# Altium PCB FPGA_DB.PcbDoc (part 2 of 5)
Units mil, origin at the board's own origin, x right, y up, seen from the top; angles counter-clockwise.
Board outline 5980 x 6510 mil, 4 copper layers (Top, Ground Plane, Power Plane, Bottom), stack 61.497 mil thick; 140 components, 246 nets, 1021 pads, 2685 vias.
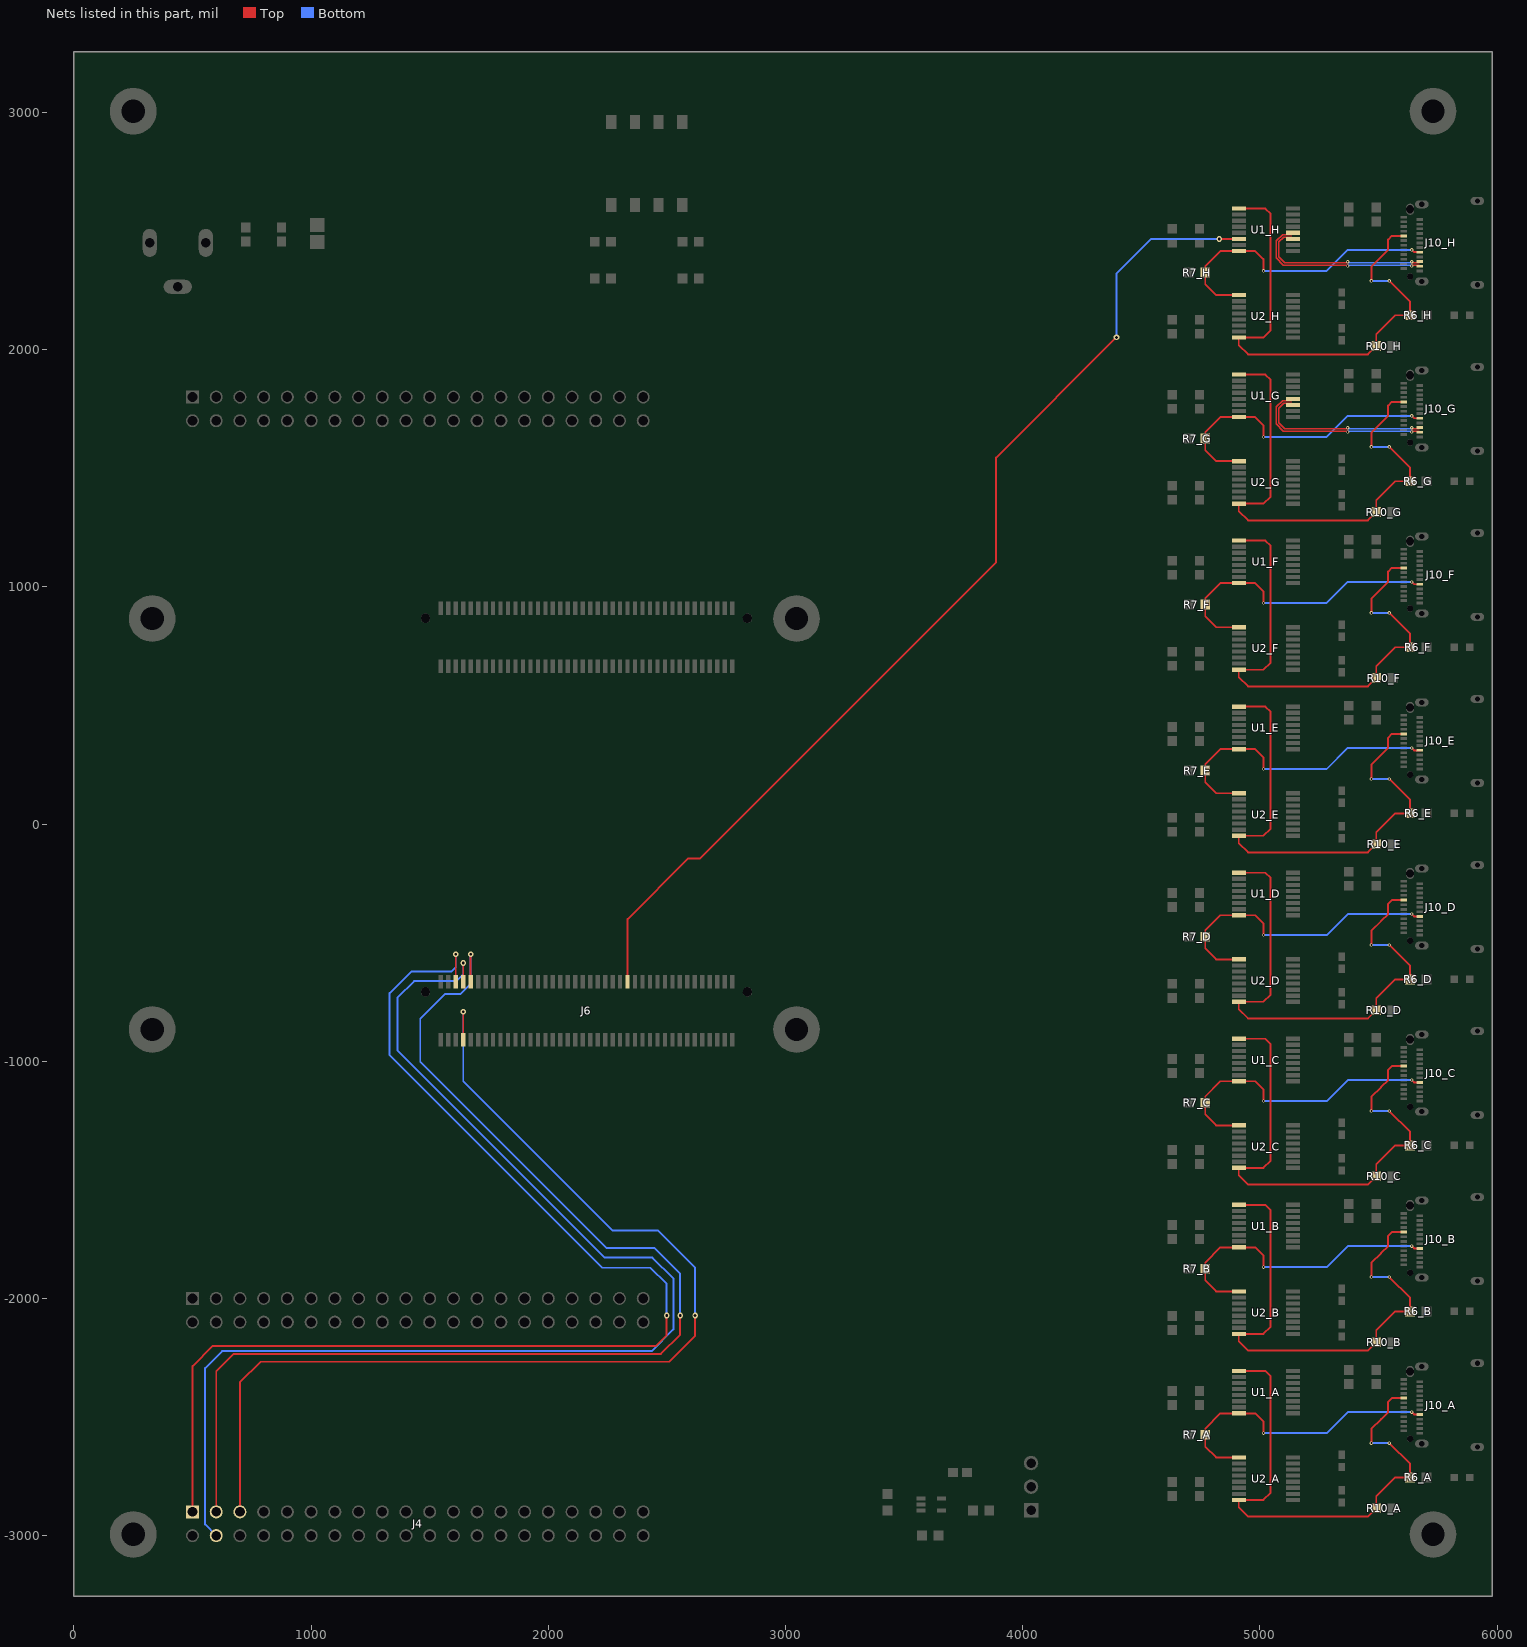
[diagram p4: the nets of this part, all layers, seen from the top]

## Via types
v1: diameter 14, hole 8, Top to Bottom, tented both sides, 2392 vias
v2: diameter 24, hole 12, Top to Bottom, tented both sides, 293 vias

## Nets (pads, with @x,y where several pads share a name; then routed paths per layer and width w, separated by ;. In a path a pad name is that pad's centre, name@x,y a point inside that pad or via, vN(x,y) a via of type N, cw(c..) or ccw(c..) an arc to the next point about the centre after c; other vN are vias at no path point) (continued)
C\S\_G_N: J10_G.B11 U1_G.12 | length 781.9
  Top w6.3: U1_G.12@5139.17,1792.2 5132.03,1785.06 5095.32,1785.06 5068.7,1758.44 5068.7,1686.39 5099.32,1655.77 5366.65,1655.77 v1(5370,1652.42) ; v1(5640,1652.42) 5643.35,1655.77 5669.9,1655.77 J10_G.B11@5674.09,1651.57
  Bottom w6.3: v1(5370,1652.42) 5373.35,1655.77 5636.65,1655.77 v1(5640,1652.42)
C\S\_G_P: J10_G.B10 U1_G.11 | length 744.4
  Top w6.3: U1_G.11@5139.17,1766.61 5132.03,1773.76 5100,1773.76 5080,1753.76 5080,1691.07 5104,1667.07 5366.65,1667.07 v1(5370,1670.42) ; v1(5640,1670.42) 5643.35,1667.07 5669.9,1667.07 J10_G.B10@5674.09,1671.26
  Bottom w6.3: v1(5370,1670.42) 5373.35,1667.07 5636.65,1667.07 v1(5640,1670.42)
C\S\_H: J6.51 U1_H.6 | length 4445.5
  Top w8: J6.51@2334.13,-665.98 2334.13,-400.86 2589.99,-145 2640,-145 3888,1103 3888,1544.61 v2(4395,2051.61) ; v2(4828.52,2466.61) U1_H.6@4910.83,2466.61
  Bottom w8: v2(4395,2051.61) 4395,2320 4541.61,2466.61 v2(4828.52,2466.61)
C\S\_H_N: J10_H.B11 U1_H.12 | length 781.9
  Top w6.3: U1_H.12@5139.17,2492.2 5132.03,2485.06 5095.32,2485.06 5068.7,2458.44 5068.7,2386.39 5099.32,2355.77 5366.65,2355.77 v1(5370,2352.42) ; v1(5640,2352.42) 5643.35,2355.77 5669.9,2355.77 J10_H.B11@5674.09,2351.57
  Bottom w6.3: v1(5370,2352.42) 5373.35,2355.77 5636.65,2355.77 v1(5640,2352.42)
C\S\_H_P: J10_H.B10 U1_H.11 | length 744.4
  Top w6.3: U1_H.11@5139.17,2466.61 5132.03,2473.76 5100,2473.76 5080,2453.76 5080,2391.07 5104,2367.07 5366.65,2367.07 v1(5370,2370.42) ; v1(5640,2370.42) 5643.35,2367.07 5669.9,2367.07 J10_H.B10@5674.09,2371.26
  Bottom w6.3: v1(5370,2370.42) 5373.35,2367.07 5636.65,2367.07 v1(5640,2370.42)
E\N\_A: J10_A.B8 R7_A.2 U1_A.8 U2_A.9 | length 1271.5
  Top w8: U2_A.9@4910.83,-2670.43 4815.43,-2670.43 4769.45,-2624.45 R7_A.2@4769.45,-2575 4769.45,-2548.81 4833.69,-2484.57 U1_A.8@4910.83,-2484.57 4980.45,-2484.57 5014.78,-2518.9 v1(5014.78,-2568.11) ; v1(5640,-2479.53) 5649.84,-2489.37 J10_A.B8@5674.09,-2489.37
  Bottom w8: v1(5014.78,-2568.11) 5281.89,-2568.11 5370.47,-2479.53 v1(5640,-2479.53)
E\N\_B: J10_B.B8 R7_B.2 U1_B.8 U2_B.9 | length 2543
  Top w8: 4769.45,-1924.45 R7_B.2@4769.45,-1875 ; 4769.45,-1924.45 4815.43,-1970.43 ; 4769.45,-1924.45 4815.43,-1970.43 ; 4769.45,-1924.45 R7_B.2@4769.45,-1875 ; R7_B.2@4769.45,-1875 4769.45,-1848.81 ; R7_B.2@4769.45,-1875 4769.45,-1848.81 ; 4769.45,-1848.81 4833.69,-1784.57 ; 4769.45,-1848.81 4833.69,-1784.57 ; 4815.43,-1970.43 U2_B.9@4910.83,-1970.43 4815.43,-1970.43 ; 4833.69,-1784.57 U1_B.8@4910.83,-1784.57 ; 4833.69,-1784.57 U1_B.8@4910.83,-1784.57 ; U1_B.8@4910.83,-1784.57 4980.45,-1784.57 ; U1_B.8@4910.83,-1784.57 4980.45,-1784.57 ; 4980.45,-1784.57 5014.78,-1818.9 ; 4980.45,-1784.57 5014.78,-1818.9 ; 5014.78,-1818.9 v1(5014.78,-1868.11) 5014.78,-1818.9 ; 5649.84,-1789.37 J10_B.B8@5674.09,-1789.37 5649.84,-1789.37 ; 5649.84,-1789.37 v1(5640,-1779.53) 5649.84,-1789.37
  Bottom w8: 5281.89,-1868.11 v1(5014.78,-1868.11) 5281.89,-1868.11 ; 5281.89,-1868.11 5370.47,-1779.53 ; 5281.89,-1868.11 5370.47,-1779.53 ; 5370.47,-1779.53 v1(5640,-1779.53) 5370.47,-1779.53
E\N\_C: J10_C.B8 R7_C.2 U1_C.8 U2_C.9 | length 2543
  Top w8: 4769.45,-1224.45 R7_C.2@4769.45,-1175 ; 4769.45,-1224.45 4815.43,-1270.43 ; 4769.45,-1224.45 R7_C.2@4769.45,-1175 ; 4769.45,-1224.45 4815.43,-1270.43 ; R7_C.2@4769.45,-1175 4769.45,-1148.81 ; R7_C.2@4769.45,-1175 4769.45,-1148.81 ; 4769.45,-1148.81 4833.69,-1084.57 ; 4769.45,-1148.81 4833.69,-1084.57 ; 4815.43,-1270.43 U2_C.9@4910.83,-1270.43 4815.43,-1270.43 ; 4833.69,-1084.57 U1_C.8@4910.83,-1084.57 ; 4833.69,-1084.57 U1_C.8@4910.83,-1084.57 ; U1_C.8@4910.83,-1084.57 4980.45,-1084.57 ; U1_C.8@4910.83,-1084.57 4980.45,-1084.57 ; 4980.45,-1084.57 5014.78,-1118.9 ; 4980.45,-1084.57 5014.78,-1118.9 ; 5014.78,-1118.9 v1(5014.78,-1168.11) 5014.78,-1118.9 ; 5649.84,-1089.37 J10_C.B8@5674.09,-1089.37 5649.84,-1089.37 ; 5649.84,-1089.37 v1(5640,-1079.53) 5649.84,-1089.37
  Bottom w8: 5281.89,-1168.11 v1(5014.78,-1168.11) 5281.89,-1168.11 ; 5281.89,-1168.11 5370.47,-1079.53 ; 5281.89,-1168.11 5370.47,-1079.53 ; 5370.47,-1079.53 v1(5640,-1079.53) 5370.47,-1079.53
E\N\_D: J10_D.B8 R7_D.2 U1_D.8 U2_D.9 | length 2543
  Top w8: 4769.45,-524.45 R7_D.2@4769.45,-475 ; 4769.45,-524.45 4815.43,-570.43 ; 4769.45,-524.45 R7_D.2@4769.45,-475 ; 4769.45,-524.45 4815.43,-570.43 ; R7_D.2@4769.45,-475 4769.45,-448.81 ; R7_D.2@4769.45,-475 4769.45,-448.81 ; 4769.45,-448.81 4833.69,-384.57 ; 4769.45,-448.81 4833.69,-384.57 ; 4815.43,-570.43 U2_D.9@4910.83,-570.43 4815.43,-570.43 ; 4833.69,-384.57 U1_D.8@4910.83,-384.57 ; 4833.69,-384.57 U1_D.8@4910.83,-384.57 ; U1_D.8@4910.83,-384.57 4980.45,-384.57 ; U1_D.8@4910.83,-384.57 4980.45,-384.57 ; 4980.45,-384.57 5014.78,-418.9 ; 4980.45,-384.57 5014.78,-418.9 ; 5014.78,-418.9 v1(5014.78,-468.11) 5014.78,-418.9 ; 5649.84,-389.37 J10_D.B8@5674.09,-389.37 5649.84,-389.37 ; 5649.84,-389.37 v1(5640,-379.53) 5649.84,-389.37
  Bottom w8: 5281.89,-468.11 v1(5014.78,-468.11) 5281.89,-468.11 ; 5281.89,-468.11 5370.47,-379.53 ; 5281.89,-468.11 5370.47,-379.53 ; 5370.47,-379.53 v1(5640,-379.53) 5370.47,-379.53
E\N\_E: J10_E.B8 R7_E.2 U1_E.8 U2_E.9 | length 2543
  Top w8: 4769.45,175.55 R7_E.2@4769.45,225 ; 4769.45,175.55 4815.43,129.57 ; 4769.45,175.55 R7_E.2@4769.45,225 ; 4769.45,175.55 4815.43,129.57 ; R7_E.2@4769.45,225 4769.45,251.19 ; R7_E.2@4769.45,225 4769.45,251.19 ; 4769.45,251.19 4833.69,315.43 ; 4769.45,251.19 4833.69,315.43 ; 4815.43,129.57 U2_E.9@4910.83,129.57 4815.43,129.57 ; 4833.69,315.43 U1_E.8@4910.83,315.43 ; 4833.69,315.43 U1_E.8@4910.83,315.43 ; U1_E.8@4910.83,315.43 4980.45,315.43 ; U1_E.8@4910.83,315.43 4980.45,315.43 ; 4980.45,315.43 5014.78,281.1 ; 4980.45,315.43 5014.78,281.1 ; 5014.78,281.1 v1(5014.78,231.89) 5014.78,281.1 ; 5649.84,310.63 J10_E.B8@5674.09,310.63 5649.84,310.63 ; 5649.84,310.63 v1(5640,320.47) 5649.84,310.63
  Bottom w8: 5281.89,231.89 v1(5014.78,231.89) 5281.89,231.89 ; 5281.89,231.89 5370.47,320.47 ; 5281.89,231.89 5370.47,320.47 ; 5370.47,320.47 v1(5640,320.47) 5370.47,320.47
E\N\_F: J10_F.B8 R7_F.2 U1_F.8 U2_F.9 | length 1271.5
  Top w8: U2_F.9@4910.83,829.57 4815.43,829.57 4769.45,875.55 R7_F.2@4769.45,925 4769.45,951.19 4833.69,1015.43 U1_F.8@4910.83,1015.43 4980.45,1015.43 5014.78,981.1 v1(5014.78,931.89) ; v1(5640,1020.47) 5649.84,1010.63 J10_F.B8@5674.09,1010.63
  Bottom w8: v1(5014.78,931.89) 5281.89,931.89 5370.47,1020.47 v1(5640,1020.47)
E\N\_G: J10_G.B8 R7_G.2 U1_G.8 U2_G.9 | length 1271.5
  Top w8: U2_G.9@4910.83,1529.57 4815.43,1529.57 4769.45,1575.55 R7_G.2@4769.45,1625 4769.45,1651.19 4833.69,1715.43 U1_G.8@4910.83,1715.43 4980.45,1715.43 5014.78,1681.1 v1(5014.78,1631.89) ; v1(5640,1720.47) 5649.84,1710.63 J10_G.B8@5674.09,1710.63
  Bottom w8: v1(5014.78,1631.89) 5281.89,1631.89 5370.47,1720.47 v1(5640,1720.47)
E\N\_H: J10_H.B8 R7_H.2 U1_H.8 U2_H.9 | length 1271.5
  Top w8: U2_H.9@4910.83,2229.57 4815.43,2229.57 4769.45,2275.55 R7_H.2@4769.45,2325 4769.45,2351.19 4833.69,2415.43 U1_H.8@4910.83,2415.43 4980.45,2415.43 5014.78,2381.1 v1(5014.78,2331.89) ; v1(5640,2420.47) 5649.84,2410.63 J10_H.B8@5674.09,2410.63
  Bottom w8: v1(5014.78,2331.89) 5281.89,2331.89 5370.47,2420.47 v1(5640,2420.47)
EN_A: J10_A.A8 R6_A.2 R10_A.2 U1_A.1 U2_A.16 | length 2182.6
  Top w8: U1_A.1@4910.83,-2305.43 5022.86,-2305.43 5045,-2327.58 5045,-2819.35 5014.78,-2849.57 U2_A.16@4910.83,-2849.57 4910.83,-2880.83 4950,-2920 5455.55,-2920 R10_A.2@5490.55,-2885 5490.55,-2834.32 5569.87,-2755 R6_A.2@5633.07,-2755 5633.07,-2697.91 v1(5545.16,-2610) ; v1(5470,-2610) 5470,-2549.94 5511.01,-2508.93 5511.01,-2508.51 5540,-2479.53 5540,-2436.24 5555.77,-2420.47 J10_A.A8@5607.17,-2420.47
  Bottom w8: v1(5470,-2610) v1(5545.16,-2610)
EN_B: J10_B.A8 R6_B.2 R10_B.2 U1_B.1 U2_B.16 | length 4365.2
  Top w8: 4910.83,-2180.83 4950,-2220 ; 4910.83,-2180.83 U2_B.16@4910.83,-2149.57 ; 4910.83,-2180.83 U2_B.16@4910.83,-2149.57 ; 4910.83,-2180.83 4950,-2220 ; U2_B.16@4910.83,-2149.57 5014.78,-2149.57 ; U2_B.16@4910.83,-2149.57 5014.78,-2149.57 ; 4950,-2220 5455.55,-2220 ; 4950,-2220 5455.55,-2220 ; 5014.78,-2149.57 5045,-2119.35 ; 5014.78,-2149.57 5045,-2119.35 ; 5022.86,-1605.43 5045,-1627.58 ; 5022.86,-1605.43 U1_B.1@4910.83,-1605.43 5022.86,-1605.43 ; 5022.86,-1605.43 5045,-1627.58 ; 5045,-2119.35 5045,-1627.58 ; 5045,-2119.35 5045,-1627.58 ; 5455.55,-2220 R10_B.2@5490.55,-2185 ; 5455.55,-2220 R10_B.2@5490.55,-2185 ; 5470,-1849.94 5511.01,-1808.93 ; 5470,-1849.94 v1(5470,-1910) 5470,-1849.94 ; 5470,-1849.94 5511.01,-1808.93 ; R10_B.2@5490.55,-2185 5490.55,-2134.32 ; R10_B.2@5490.55,-2185 5490.55,-2134.32 ; 5490.55,-2134.32 5569.87,-2055 ; 5490.55,-2134.32 5569.87,-2055 ; 5511.01,-1808.93 5511.01,-1808.51 ; 5511.01,-1808.93 5511.01,-1808.51 ; 5511.01,-1808.51 5540,-1779.53 ; 5511.01,-1808.51 5540,-1779.53 ; 5540,-1779.53 5540,-1736.24 ; 5540,-1779.53 5540,-1736.24 ; 5540,-1736.24 5555.77,-1720.47 ; 5540,-1736.24 5555.77,-1720.47 ; 5555.77,-1720.47 J10_B.A8@5607.17,-1720.47 5555.77,-1720.47 ; 5569.87,-2055 R6_B.2@5633.07,-2055 ; 5569.87,-2055 R6_B.2@5633.07,-2055 ; R6_B.2@5633.07,-2055 5633.07,-1997.91 ; R6_B.2@5633.07,-2055 5633.07,-1997.91 ; 5633.07,-1997.91 v1(5545.16,-1910) 5633.07,-1997.91
  Bottom w8: v1(5470,-1910) v1(5545.16,-1910) v1(5470,-1910)
EN_C: J10_C.A8 R6_C.2 R10_C.2 U1_C.1 U2_C.16 | length 4365.2
  Top w8: 4910.83,-1480.83 4950,-1520 ; 4910.83,-1480.83 U2_C.16@4910.83,-1449.57 ; 4910.83,-1480.83 4950,-1520 ; 4910.83,-1480.83 U2_C.16@4910.83,-1449.57 ; U2_C.16@4910.83,-1449.57 5014.78,-1449.57 ; U2_C.16@4910.83,-1449.57 5014.78,-1449.57 ; 4950,-1520 5455.55,-1520 ; 4950,-1520 5455.55,-1520 ; 5014.78,-1449.57 5045,-1419.35 ; 5014.78,-1449.57 5045,-1419.35 ; 5022.86,-905.43 5045,-927.58 ; 5022.86,-905.43 U1_C.1@4910.83,-905.43 5022.86,-905.43 ; 5022.86,-905.43 5045,-927.58 ; 5045,-1419.35 5045,-927.58 ; 5045,-1419.35 5045,-927.58 ; 5455.55,-1520 R10_C.2@5490.55,-1485 ; 5455.55,-1520 R10_C.2@5490.55,-1485 ; 5470,-1149.94 5511.01,-1108.93 ; 5470,-1149.94 v1(5470,-1210) 5470,-1149.94 ; 5470,-1149.94 5511.01,-1108.93 ; R10_C.2@5490.55,-1485 5490.55,-1434.32 ; R10_C.2@5490.55,-1485 5490.55,-1434.32 ; 5490.55,-1434.32 5569.87,-1355 ; 5490.55,-1434.32 5569.87,-1355 ; 5511.01,-1108.93 5511.01,-1108.51 ; 5511.01,-1108.93 5511.01,-1108.51 ; 5511.01,-1108.51 5540,-1079.53 ; 5511.01,-1108.51 5540,-1079.53 ; 5540,-1079.53 5540,-1036.24 ; 5540,-1079.53 5540,-1036.24 ; 5540,-1036.24 5555.77,-1020.47 ; 5540,-1036.24 5555.77,-1020.47 ; 5555.77,-1020.47 J10_C.A8@5607.17,-1020.47 5555.77,-1020.47 ; 5569.87,-1355 R6_C.2@5633.07,-1355 ; 5569.87,-1355 R6_C.2@5633.07,-1355 ; R6_C.2@5633.07,-1355 5633.07,-1297.91 ; R6_C.2@5633.07,-1355 5633.07,-1297.91 ; 5633.07,-1297.91 v1(5545.16,-1210) 5633.07,-1297.91
  Bottom w8: v1(5470,-1210) v1(5545.16,-1210) v1(5470,-1210)
EN_D: J10_D.A8 R6_D.2 R10_D.2 U1_D.1 U2_D.16 | length 4365.2
  Top w8: 4910.83,-780.83 4950,-820 ; 4910.83,-780.83 U2_D.16@4910.83,-749.57 ; 4910.83,-780.83 4950,-820 ; 4910.83,-780.83 U2_D.16@4910.83,-749.57 ; U2_D.16@4910.83,-749.57 5014.78,-749.57 ; U2_D.16@4910.83,-749.57 5014.78,-749.57 ; 4950,-820 5455.55,-820 ; 4950,-820 5455.55,-820 ; 5014.78,-749.57 5045,-719.35 ; 5014.78,-749.57 5045,-719.35 ; 5022.86,-205.43 5045,-227.58 ; 5022.86,-205.43 U1_D.1@4910.83,-205.43 5022.86,-205.43 ; 5022.86,-205.43 5045,-227.58 ; 5045,-719.35 5045,-227.58 ; 5045,-719.35 5045,-227.58 ; 5455.55,-820 R10_D.2@5490.55,-785 ; 5455.55,-820 R10_D.2@5490.55,-785 ; 5470,-449.94 5511.01,-408.93 ; 5470,-449.94 v1(5470,-510) 5470,-449.94 ; 5470,-449.94 5511.01,-408.93 ; R10_D.2@5490.55,-785 5490.55,-734.32 ; R10_D.2@5490.55,-785 5490.55,-734.32 ; 5490.55,-734.32 5569.87,-655 ; 5490.55,-734.32 5569.87,-655 ; 5511.01,-408.93 5511.01,-408.51 ; 5511.01,-408.93 5511.01,-408.51 ; 5511.01,-408.51 5540,-379.53 ; 5511.01,-408.51 5540,-379.53 ; 5540,-379.53 5540,-336.24 ; 5540,-379.53 5540,-336.24 ; 5540,-336.24 5555.77,-320.47 ; 5540,-336.24 5555.77,-320.47 ; 5555.77,-320.47 J10_D.A8@5607.17,-320.47 5555.77,-320.47 ; 5569.87,-655 R6_D.2@5633.07,-655 ; 5569.87,-655 R6_D.2@5633.07,-655 ; R6_D.2@5633.07,-655 5633.07,-597.91 ; R6_D.2@5633.07,-655 5633.07,-597.91 ; 5633.07,-597.91 v1(5545.16,-510) 5633.07,-597.91
  Bottom w8: v1(5470,-510) v1(5545.16,-510) v1(5470,-510)
EN_E: J10_E.A8 R6_E.2 R10_E.2 U1_E.1 U2_E.16 | length 4365.2
  Top w8: 4910.83,-80.83 4950,-120 ; 4910.83,-80.83 U2_E.16@4910.83,-49.57 ; 4910.83,-80.83 4950,-120 ; 4910.83,-80.83 U2_E.16@4910.83,-49.57 ; U2_E.16@4910.83,-49.57 5014.78,-49.57 ; U2_E.16@4910.83,-49.57 5014.78,-49.57 ; 4950,-120 5455.55,-120 ; 4950,-120 5455.55,-120 ; 5014.78,-49.57 5045,-19.35 ; 5014.78,-49.57 5045,-19.35 ; 5022.86,494.57 5045,472.42 ; 5022.86,494.57 U1_E.1@4910.83,494.57 5022.86,494.57 ; 5022.86,494.57 5045,472.42 ; 5045,-19.35 5045,472.42 ; 5045,-19.35 5045,472.42 ; 5455.55,-120 R10_E.2@5490.55,-85 ; 5455.55,-120 R10_E.2@5490.55,-85 ; 5470,250.06 5511.01,291.07 ; 5470,250.06 v1(5470,190) 5470,250.06 ; 5470,250.06 5511.01,291.07 ; R10_E.2@5490.55,-85 5490.55,-34.32 ; R10_E.2@5490.55,-85 5490.55,-34.32 ; 5490.55,-34.32 5569.87,45 ; 5490.55,-34.32 5569.87,45 ; 5511.01,291.07 5511.01,291.49 ; 5511.01,291.07 5511.01,291.49 ; 5511.01,291.49 5540,320.47 ; 5511.01,291.49 5540,320.47 ; 5540,320.47 5540,363.76 ; 5540,320.47 5540,363.76 ; 5540,363.76 5555.77,379.53 ; 5540,363.76 5555.77,379.53 ; 5555.77,379.53 J10_E.A8@5607.17,379.53 5555.77,379.53 ; 5569.87,45 R6_E.2@5633.07,45 ; 5569.87,45 R6_E.2@5633.07,45 ; R6_E.2@5633.07,45 5633.07,102.09 ; R6_E.2@5633.07,45 5633.07,102.09 ; 5633.07,102.09 v1(5545.16,190) 5633.07,102.09
  Bottom w8: v1(5470,190) v1(5545.16,190) v1(5470,190)
EN_F: J10_F.A8 R6_F.2 R10_F.2 U1_F.1 U2_F.16 | length 2182.6
  Top w8: U1_F.1@4910.83,1194.57 5022.86,1194.57 5045,1172.42 5045,680.65 5014.78,650.43 U2_F.16@4910.83,650.43 4910.83,619.17 4950,580 5455.55,580 R10_F.2@5490.55,615 5490.55,665.68 5569.87,745 R6_F.2@5633.07,745 5633.07,802.09 v1(5545.16,890) ; v1(5470,890) 5470,950.06 5511.01,991.07 5511.01,991.49 5540,1020.47 5540,1063.76 5555.77,1079.53 J10_F.A8@5607.17,1079.53
  Bottom w8: v1(5470,890) v1(5545.16,890)
EN_G: J10_G.A8 R6_G.2 R10_G.2 U1_G.1 U2_G.16 | length 2182.6
  Top w8: U1_G.1@4910.83,1894.57 5022.86,1894.57 5045,1872.42 5045,1380.65 5014.78,1350.43 U2_G.16@4910.83,1350.43 4910.83,1319.17 4950,1280 5455.55,1280 R10_G.2@5490.55,1315 5490.55,1365.68 5569.87,1445 R6_G.2@5633.07,1445 5633.07,1502.09 v1(5545.16,1590) ; v1(5470,1590) 5470,1650.06 5511.01,1691.07 5511.01,1691.49 5540,1720.47 5540,1763.76 5555.77,1779.53 J10_G.A8@5607.17,1779.53
  Bottom w8: v1(5470,1590) v1(5545.16,1590)
EN_H: J10_H.A8 R6_H.2 R10_H.2 U1_H.1 U2_H.16 | length 2182.6
  Top w8: U1_H.1@4910.83,2594.57 5022.86,2594.57 5045,2572.42 5045,2080.65 5014.78,2050.43 U2_H.16@4910.83,2050.43 4910.83,2019.17 4950,1980 5455.55,1980 R10_H.2@5490.55,2015 5490.55,2065.68 5569.87,2145 R6_H.2@5633.07,2145 5633.07,2202.09 v1(5545.16,2290) ; v1(5470,2290) 5470,2350.06 5511.01,2391.07 5511.01,2391.49 5540,2420.47 5540,2463.76 5555.77,2479.53 J10_H.A8@5607.17,2479.53
  Bottom w8: v1(5470,2290) v1(5545.16,2290)
FPGA_TCK: J4.01 J6.05 | length 5209
  Top w8: J4.01@500,-2900 500,-2285 585,-2200 2455,-2200 2499,-2156 v2(2499,-2072) ; J6.05@1609.72,-665.98 v2(1609.72,-548.81)
  Bottom w8: v2(1609.72,-548.81) 1609.72,-603.28 1591,-622 1422,-622 1331,-713 1331,-974 2227.65,-1870.65 2430.69,-1870.65 2499,-1938.96 v2(2499,-2072)
FPGA_TDI: J4.03 J6.09 | length 5033
  Top w8: J4.03@600,-2900 600,-2308 674,-2234 2475,-2234 2556,-2153 v2(2556,-2072) ; J6.09@1672.72,-665.98 v2(1672.72,-548.81)
  Bottom w8: v2(1672.72,-548.81) 1672.72,-674.07 1630.79,-716 1564.72,-716 1460,-820.72 1460,-1002 2246.13,-1788.13 2448.68,-1788.13 2556,-1895.45 v2(2556,-2072)
FPGA_TDO: J4.05 J6.08 | length 4546.3
  Top w8: J4.05@700,-2900 700,-2354 787,-2267 2510,-2267 2618.93,-2158.07 v2(2618.93,-2072.34) ; J6.08@1641.22,-908.98 v2(1641.22,-791.8)
  Bottom w8: v2(1641.22,-791.8) 1641.22,-1084.22 2270.43,-1713.43 2461.19,-1713.43 2618.93,-1871.17 v2(2618.93,-2072.34)
FPGA_TMS: J4.04 J6.07 | length 5210.1
  Top w8: J6.07@1641.22,-665.98 v2(1641.22,-585.81)
  Bottom w8: J4.04@600,-3000 553,-2953 553,-2294 625,-2222 2436,-2222 2527,-2131 2527,-1915.94 2438.78,-1827.72 2237.72,-1827.72 1365,-955 1365,-731.07 1434.07,-662 1612,-662 1641.22,-632.78 1641.22,-590.14 v2(1641.22,-585.81)